# EAGLE board power (EAGLE 9.6.2)
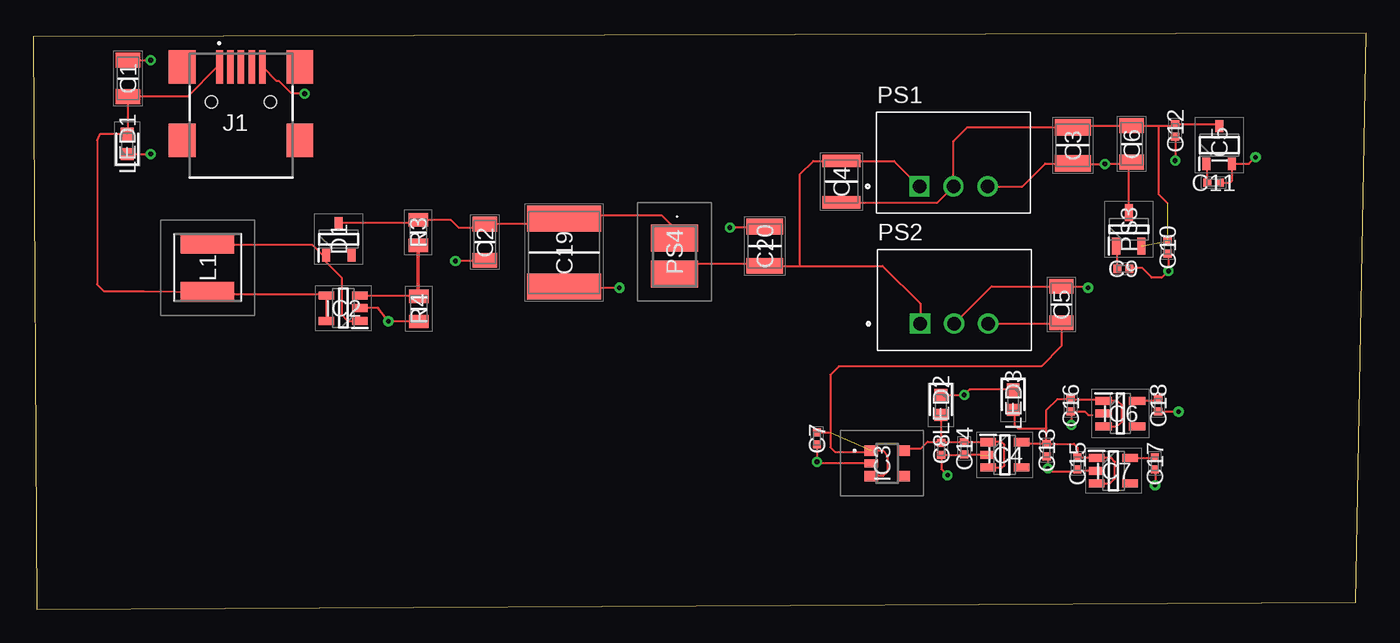
[diagram p0: board, top side]
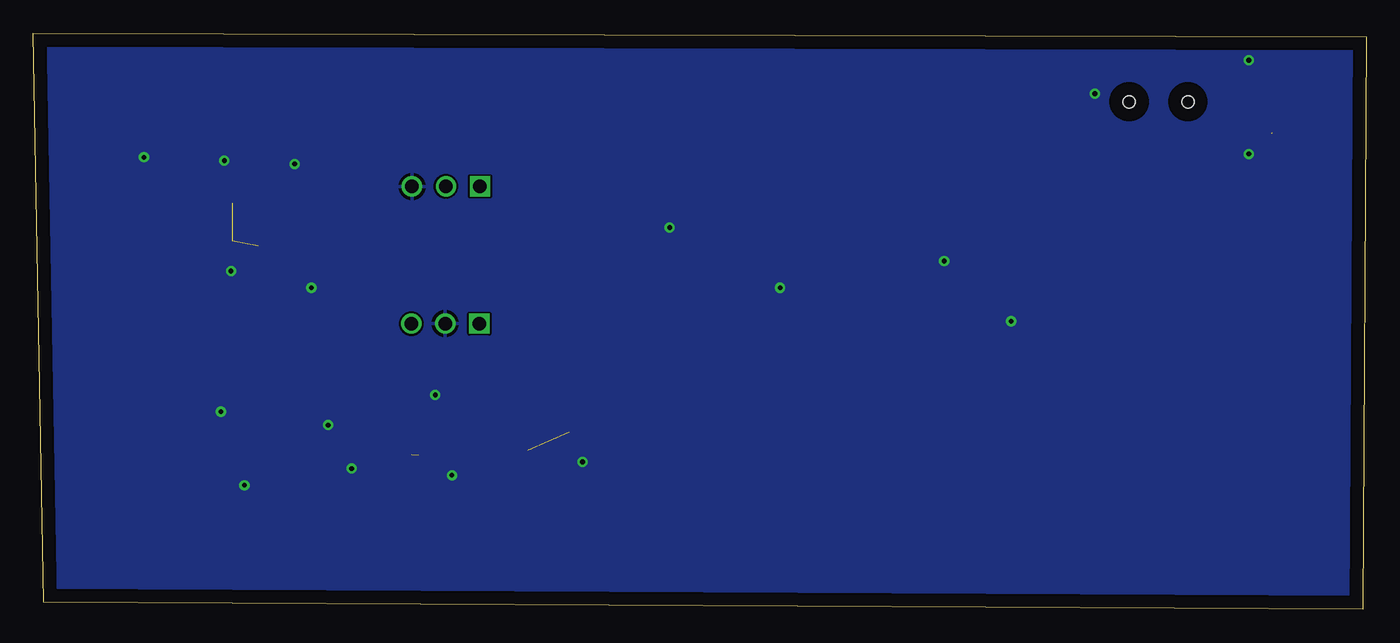
[diagram p1: board, bottom side, seen from below]

Size 99.5 x 43 mm. Coordinates in mm from the lower left corner, seen from the top.
Outline: 0.25,0 98.75,0.5 99.5,43 0,42.75 0.25,0
Copper layers (1*16): Top 0.035mm / dielectric 1.5mm / Bottom 0.035mm
Design rules "default": minimum track width 6mil, minimum drill 0.35mm, track to track 6mil, track to pad 6mil, pad to pad 6mil, via to via 6mil, smd to smd 6mil, copper to edge 40mil, drill to drill 6mil, minimum pad ring 10mil, minimum via ring 8mil, stop-mask expansion 4mil, vias tented up to drill 0mil, thermal gap 10mil

## Footprints (pad centres in the part's own frame; a part is rotated, then mirrored left to right if it is on the bottom)
CAPC3216X180N = smd 1.1 x 1.82: 1 -1.36,0; 2 1.36,0
CAPC3225X270N = smd 1.22 x 2.72: 1 -1.35,0; 2 1.35,0
CAPC3225X280N = smd 0.91 x 2.82: 1 -1.55,0; 2 1.55,0
CAPC1005X55N = smd 0.6 x 0.62: 1 -0.46,0; 2 0.46,0
CAPC6153X390N = smd 1.95 x 5.52: 1 -2.53,0; 2 2.53,0
CAPC3325X279N = smd 1.18 x 2.72: 1 -1.47,0; 2 1.47,0
SOT95P240X115-3N = smd 0.9 x 0.6: 1 -1.2,0.95; 2 -1.2,-0.95; 3 1.2,0
SOT95P280X145-5N = smd 1.15 x 0.6: 1 -1.25,0.95; 2 -1.25,0; 3 -1.25,-0.95; 4 1.25,-0.95; 5 1.25,0.95
TCR2EF50LMCT = smd 0.8 x 1: 1 -0.95,-1.2; 3 0.95,-1.2; 4 0.95,1.2; 5 -0.95,1.2 | smd 0.6 x 1: 2 0,-1.2
SOT95P280X100-5N = smd 1.15 x 0.6: 1 -1.25,0.95; 2 -1.25,0; 3 -1.25,-0.95; 4 1.25,-0.95; 5 1.25,0.95
SOT95P280X130-3N = smd 0.9 x 0.6: 1 -1.4,0.95; 2 -1.4,-0.95; 3 1.4,0
SOT95P275X110-5N = smd 1.25 x 0.6: 1 -1.25,0.95; 2 -1.25,0; 3 -1.25,-0.95; 4 1.25,-0.95; 5 1.25,0.95
65100516121 = smd 0.5 x 2.5: 1 -1.6,-1; 2 -0.8,-1; 3 0,-1; 4 0.8,-1; 5 1.6,-1 | smd 2 x 2.5: 6 -4.4,-1; 7 4.4,-1; 8 4.4,-6.5; 9 -4.4,-6.5 | hole 0.9: -2.2,-3.6; 2.2,-3.6
VLS5045EX330M = smd 1.5 x 4: 1 -1.8,0; 2 1.8,0
LEDC1608X40N = smd 0.9 x 0.95: 1 -0.75,0; 2 0.75,0
CONV_R-786.5-0.5 = drill 1 square: 1 -2.54,-1.775 | drill 1: 2 0,-1.775; 3 2.54,-1.775
SOT95P275X130-3N = smd 1.25 x 0.6: 1 -1.25,0.95; 2 -1.25,-0.95; 3 1.25,0
RLS397 = smd 2 x 3.5: 1 -1.35,0; 2 1.35,0
RESC2012X55N = smd 1 x 1.45: 1 -0.95,0; 2 0.95,0

## Placement (x,y rotation side)
C1  LMF316AB7475KLHT  [CAPC3216X180N]  7.05,39.64 90 top
C2  LMF316AB7475KLHT  [CAPC3216X180N]  33.7,27.41 270 top
C3  LMF325B7106KMHP  [CAPC3225X270N]  77.61,34.64 90 top
C4  GRJ32ER71H106KE11L  [CAPC3225X280N]  60.33,31.93 270 top
C5  LMF316AB7475KLHT  [CAPC3216X180N]  76.75,22.75 90 top
C6  LMF316AB7475KLHT  [CAPC3216X180N]  82,34.75 270 top
C7  GRM155R70J105KA12D  [CAPC1005X55N]  58.5,12.75 270 top
C8  GRM155R70J105KA12D  [CAPC1005X55N]  67.78,11.97 270 top
C9  GRM155R70J105KA12D  [CAPC1005X55N]  81.38,25.43 180 top
C10  GRM155R70J105KA12D  [CAPC1005X55N]  84.68,27.03 90 top
C11  GRM155R70J105KA12D  [CAPC1005X55N]  88.12,31.86 0 top
C12  GRM155R70J105KA12D  [CAPC1005X55N]  85.25,35.75 270 top
C13  GRM155R70J105KA12D  [CAPC1005X55N]  75.65,11.88 270 top
C14  GRM155R70J105KA12D  [CAPC1005X55N]  69.5,12 270 top
C15  GRM155R70J105KA12D  [CAPC1005X55N]  77.94,10.88 270 top
C16  GRM155R70J105KA12D  [CAPC1005X55N]  77.44,15.22 270 top
C17  GRM155R70J105KA12D  [CAPC1005X55N]  83.73,10.88 270 top
C18  GRM155R70J105KA12D  [CAPC1005X55N]  83.98,15.22 270 top
C19  KRM55QR72A106KH01L  [CAPC6153X390N]  39.63,26.63 270 top
C20  12101C335KAT2A  [CAPC3325X279N]  54.61,27.11 90 top
D1  BAT54CHYFHT116  [SOT95P240X115-3N]  22.79,27.63 90 top
IC2  LM2703MFX-ADJ_NOPB  [SOT95P280X145-5N]  23.13,22.48 180 top
IC3  TCR2EF50,LM_CT  [TCR2EF50LMCT]  63.76,10.89 270 top
IC4  ADM7160AUJZ-2.5-R7  [SOT95P280X100-5N]  72.53,11.52 0 top
IC5  XC6902N251MR-G  [SOT95P280X130-3N]  88.54,34.66 90 top
IC6  NCV8114ASN165T1G  [SOT95P275X110-5N]  81.16,14.61 0 top
IC7  NCP163ASN150T1G  [SOT95P280X145-5N]  80.64,10.33 0 top
J1  65100516121  [65100516121]  15.5,41.5 0 top
L1  VLS5045EX-100M-H  [VLS5045EX330M]  13,25.5 90 top
LED1  LT_Q39G-Q1OO-25-1  [LEDC1608X40N]  7,34.75 90 top
LED2  LT_Q39G-Q1OO-25-1  [LEDC1608X40N]  67.75,15.25 270 top
LED3  LB_Q39E-N1OO-35-1  [LEDC1608X40N]  73.15,15.64 270 top
PS1  R-786.5-0.5  [CONV_R-786.5-0.5]  68.7,33.35 0 top
PS2  R-786.5-0.5  [CONV_R-786.5-0.5]  68.75,23.1 0 top
PS3  TC595002ECBTR  [SOT95P275X130-3N]  81.79,28.37 90 top
PS4  RLS-397  [RLS397]  47.86,26.37 270 top
R3  TNPW080527K4BEEN  [RESC2012X55N]  28.73,28.14 90 top
R4  TNPW080527K4BEEN  [RESC2012X55N]  28.77,22.43 270 top

## Library data of the parts
C1 C2 C5 C6 = SamacSys_Parts; DESCRIPTION: Multilayer Ceramic Capacitors MLCC - SMD/SMT 1206 10VDC 4.7uF 10% X7R AEC-Q200; HEIGHT: 1.8mm; MANUFACTURER_NAME: TAIYO YUDEN; MANUFACTURER_PART_NUMBER: LMF316AB7475KLHT; MOUSER_PART_NUMBER: 963-LMF316AB7475KLHT; MOUSER_PRICE-STOCK: https://www.mouser.co.uk/ProductDetail/Taiyo-Yuden/LMF316AB7475KLHT?qs=%252B6g0mu59x7Jucp0YIcNtlw%3D%3D
C3 = SamacSys_Parts; DESCRIPTION: Multilayer Ceramic Capacitors MLCC - SMD/SMT 1210 10VDC 10uF 10% X7R AEC-Q200; HEIGHT: 2.7mm; MANUFACTURER_NAME: TAIYO YUDEN; MANUFACTURER_PART_NUMBER: LMF325B7106KMHP; MOUSER_PART_NUMBER: 963-LMF325B7106KMHP; MOUSER_PRICE-STOCK: https://www.mouser.co.uk/ProductDetail/Taiyo-Yuden/LMF325B7106KMHP?qs=W%2FMpXkg%252BdQ7tCScIXneZ%2FA%3D%3D
C4 = SamacSys_Parts; ARROW_PART_NUMBER: GRJ32ER71H106KE11L; ARROW_PRICE-STOCK: https://www.arrow.com/en/products/grj32er71h106ke11l/murata-manufacturing?region=nac; DESCRIPTION: Cap Ceramic 10uF 50V X7R 10% Pad SMD 1210 Soft Termination 125C T/R; HEIGHT: 2.8mm; MANUFACTURER_NAME: Murata Electronics; MANUFACTURER_PART_NUMBER: GRJ32ER71H106KE11L; MOUSER_PART_NUMBER: 81-GRJ32ER71H106KE1L; MOUSER_PRICE-STOCK: https://www.mouser.co.uk/ProductDetail/Murata-Electronics/GRJ32ER71H106KE11L?qs=Mkt%2FZhxPIiRCGrZ4HFiKZA%3D%3D
C7-C18 = SamacSys_Parts; ARROW_PART_NUMBER: GRM155R70J105KA12D; ARROW_PRICE-STOCK: https://www.arrow.com/en/products/grm155r70j105ka12d/murata-manufacturing?region=nac; DESCRIPTION: Multilayer Ceramic Capacitors MLCC - SMD/SMT 0402 1.0uF 6.3volts *Derate Voltage/Temp; HEIGHT: 0.55mm; MANUFACTURER_NAME: Murata Electronics; MANUFACTURER_PART_NUMBER: GRM155R70J105KA12D; MOUSER_PART_NUMBER: 81-GRM155R70J105KA2D; MOUSER_PRICE-STOCK: https://www.mouser.co.uk/ProductDetail/Murata-Electronics/GRM155R70J105KA12D?qs=OXzh9Ga2KBHWfvlODrgZnQ%3D%3D
C19 = SamacSys_Parts; ARROW_PART_NUMBER: KRM55QR72A106KH01L; ARROW_PRICE-STOCK: https://www.arrow.com/en/products/krm55qr72a106kh01l/murata-manufacturing?region=nac; DESCRIPTION: Multilayer Ceramic Capacitors MLCC - SMD/SMT; HEIGHT: 3.9mm; MANUFACTURER_NAME: Murata Electronics; MANUFACTURER_PART_NUMBER: KRM55QR72A106KH01L; MOUSER_PART_NUMBER: 81-KRM55QR72A106KH1L; MOUSER_PRICE-STOCK: https://www.mouser.co.uk/ProductDetail/Murata-Electronics/KRM55QR72A106KH01L?qs=qkDYIeTQ%252BElto0fJu%2F86Vw%3D%3D
C20 = SamacSys_Parts; DESCRIPTION: Multilayer Ceramic Capacitors MLCC - SMD/SMT 100V 3.3uF X7R 1210 10%; HEIGHT: 2.79mm; MANUFACTURER_NAME: AVX; MANUFACTURER_PART_NUMBER: 12101C335KAT2A; MOUSER_PART_NUMBER: 581-12101C335KAT2A; MOUSER_PRICE-STOCK: https://www.mouser.co.uk/ProductDetail/AVX/12101C335KAT2A?qs=t3bE0qb%2FqELbFuOKr%2F10pA%3D%3D
D1 = SamacSys_Parts; DESCRIPTION: Schottky Diodes & Rectifiers SCHOTTKY BARRIER DIODE; HEIGHT: 1.15mm; MANUFACTURER_NAME: ROHM Semiconductor; MANUFACTURER_PART_NUMBER: BAT54CHYFHT116; MOUSER_PART_NUMBER: 755-BAT54CHYFHT116; MOUSER_PRICE-STOCK: https://www.mouser.co.uk/ProductDetail/ROHM-Semiconductor/BAT54CHYFHT116?qs=QNEnbhJQKvbxVoFekP9UeQ%3D%3D
IC2 = SamacSys_Parts; ARROW_PART_NUMBER: LM2703MFX-ADJ/NOPB; ARROW_PRICE-STOCK: https://www.arrow.com/en/products/lm2703mfx-adjnopb/texas-instruments; DESCRIPTION: Micropower Step-Up DC/DC Converter with 350mA Peak Current Limit; HEIGHT: 1.45mm; MANUFACTURER_NAME: Texas Instruments; MANUFACTURER_PART_NUMBER: LM2703MFX-ADJ/NOPB; MOUSER_PART_NUMBER: 926-LM2703MFXADJNOPB; MOUSER_PRICE-STOCK: https://www.mouser.com/Search/Refine.aspx?Keyword=926-LM2703MFXADJNOPB
IC3 = SamacSys_Parts; DESCRIPTION: LDO Voltage Regulators 200mA LDO, Vout=5.0V, Dropout=180mV, Iq=35uA, PSRR=73dB, in SOT-25 (SMV) package; HEIGHT: 1.4mm; MANUFACTURER_NAME: Toshiba; MANUFACTURER_PART_NUMBER: TCR2EF50,LM(CT; MOUSER_PART_NUMBER: 757-TCR2EF50LMCT; MOUSER_PRICE-STOCK: https://www.mouser.co.uk/ProductDetail/Toshiba/TCR2EF50LMCT?qs=bZr6mbWTK5m4vMduq2OXCA%3D%3D
IC4 = SamacSys_Parts; DESCRIPTION: LDO Voltage Regulators 200mA LDO 25Vout; HEIGHT: 1mm; MANUFACTURER_NAME: Linear Technology; MANUFACTURER_PART_NUMBER: ADM7160AUJZ-2.5-R7; MOUSER_PART_NUMBER: 584-ADM7160AUJZ2.5R7; MOUSER_PRICE-STOCK: https://www.mouser.com/Search/Refine.aspx?Keyword=584-ADM7160AUJZ2.5R7
IC5 = SamacSys_Parts; DESCRIPTION: LDO Voltage Regulators; HEIGHT: 1.3mm; MANUFACTURER_NAME: Torex; MANUFACTURER_PART_NUMBER: XC6902N251MR-G; MOUSER_PART_NUMBER: 865-XC6902N251MR-G; MOUSER_PRICE-STOCK: https://www.mouser.co.uk/ProductDetail/Torex-Semiconductor/XC6902N251MR-G/?qs=AsjdqWjXhJ97TLkuQPXWBQ%3D%3D
IC6 = SamacSys_Parts; ARROW_PART_NUMBER: NCV8114ASN165T1G; ARROW_PRICE-STOCK: https://www.arrow.com/en/products/ncv8114asn165t1g/on-semiconductor?region=nac; DESCRIPTION: ONSEMI - NCV8114ASN165T1G - LDO REGULATOR, 300 MA, LOW IQ 1.65V AD; HEIGHT: 1.1mm; MANUFACTURER_NAME: ON Semiconductor; MANUFACTURER_PART_NUMBER: NCV8114ASN165T1G; MOUSER_PART_NUMBER: 863-NCV8114ASN165T1G; MOUSER_PRICE-STOCK: https://www.mouser.co.uk/ProductDetail/onsemi/NCV8114ASN165T1G?qs=PqoDHHvF64%252BWMsY7A2HF3Q%3D%3D
IC7 = SamacSys_Parts; DESCRIPTION: ONSEMI - NCP163ASN150T1G - LDO Voltage Regulator, Fixed, 2.2 V to 5.5 V in, 1.5 V / 250 mA out, SOT23-5; HEIGHT: 1.45mm; MANUFACTURER_NAME: ON Semiconductor; MANUFACTURER_PART_NUMBER: NCP163ASN150T1G; MOUSER_PART_NUMBER: 863-NCP163ASN150T1G; MOUSER_PRICE-STOCK: https://www.mouser.co.uk/ProductDetail/onsemi/NCP163ASN150T1G?qs=vLWxofP3U2x6R82l9MbdEQ%3D%3D
J1 = SamacSys_Parts; DESCRIPTION: WR-COM USB Connector Mini horizontal SMD Wurth Elektronik WR-COM Series Right Angle SMT Type B Mini USB Connector Receptacle, 30 V ac, 1A; HEIGHT: mm; MANUFACTURER_NAME: Wurth Elektronik; MANUFACTURER_PART_NUMBER: 65100516121; MOUSER_PART_NUMBER: 710-65100516121; MOUSER_PRICE-STOCK: https://www.mouser.co.uk/ProductDetail/Wurth-Elektronik/65100516121?qs=rS3zZhy2AQPLyCguT204Og%3D%3D
L1 = SamacSys_Parts; ARROW_PART_NUMBER: VLS5045EX-100M-H; ARROW_PRICE-STOCK: https://www.arrow.com/en/products/vls5045ex-100m-h/tdk; DESCRIPTION: SMD / SMT Inductors (Coils), L=10?H, L x W x T :; HEIGHT: 4mm; MANUFACTURER_NAME: TDK; MANUFACTURER_PART_NUMBER: VLS5045EX-100M-H; MOUSER_PART_NUMBER: 810-VLS5045EX-100M-H; MOUSER_PRICE-STOCK: https://www.mouser.co.uk/ProductDetail/TDK/VLS5045EX-100M-H?qs=EBDBlbfErPxDDKYBGzjLDg%3D%3D
LED1 LED2 = SamacSys_Parts; DESCRIPTION: 2.85 V Green LED 1608 (0603) SMD,Osram Opto CHIPLED 0603 LT Q39G-Q1OO-25-1; HEIGHT: 0.4mm; MANUFACTURER_NAME: OSRAM; MANUFACTURER_PART_NUMBER: LT Q39G-Q1OO-25-1; MOUSER_PART_NUMBER: 720-LTQ39GQ1S22515; MOUSER_PRICE-STOCK: https://www.mouser.co.uk/ProductDetail/OSRAM-Opto-Semiconductors/LT-Q39G-Q1OO-25-1?qs=74fRo9GAWszgXtz8D2kVhg%3D%3D
LED3 = SamacSys_Parts; DESCRIPTION: Standard LEDs - SMD Blue 470nm; HEIGHT: 0.4mm; MANUFACTURER_NAME: OSRAM; MANUFACTURER_PART_NUMBER: LB Q39E-N1OO-35-1; MOUSER_PART_NUMBER: 720-LBQ39EN1P1351; MOUSER_PRICE-STOCK: https://www.mouser.co.uk/ProductDetail/OSRAM-Opto-Semiconductors/LB-Q39E-N1OO-35-1?qs=74fRo9GAWsyCe%2Fcwa%2FhbPA%3D%3D
PS1 PS2 = R-786.5-0.5; DESCRIPTION: 0.5A DC/DC-Converter 'INNOLINE' SIP3 reg; DIGI-KEY_PART_NUMBER: 945-1039-ND; MF: Recom Power; MP: R-786.5-0.5; PACKAGE: SIP-3 Recom Power; PURCHASE-URL: https://pricing.snapeda.com/search/part/R-786.5-0.5/?ref=eda
PS3 = SamacSys_Parts; ARROW_PART_NUMBER: TC595002ECBTR; ARROW_PRICE-STOCK: https://www.arrow.com/en/products/tc595002ecbtr/microchip-technology; DESCRIPTION: 100mA -5V LDO Negative Regulator SOT-23A Microchip TC595002ECBTR, LDO Voltage Regulator, 100mA,; HEIGHT: 1.3mm; MANUFACTURER_NAME: Microchip; MANUFACTURER_PART_NUMBER: TC595002ECBTR; MOUSER_PART_NUMBER: 579-TC595002ECBTR; MOUSER_PRICE-STOCK: https://www.mouser.co.uk/ProductDetail/Microchip-Technology/TC595002ECBTR?qs=n%2FfJlMG9rCbPVifAtUx8yQ%3D%3D
PS4 = SamacSys_Parts; DESCRIPTION: Inductor Power Unshielded Wirewound 3.9uH 20% 100KHz 1.32A 0.14Ohm DCR 1812 Bag; HEIGHT: 3.1mm; MANUFACTURER_NAME: RECOM Power; MANUFACTURER_PART_NUMBER: RLS-397; MOUSER_PART_NUMBER: 919-RLS-397; MOUSER_PRICE-STOCK: https://www.mouser.co.uk/ProductDetail/RECOM-Power/RLS-397?qs=gZXFycFWdAMzj7SWZ0VCrw%3D%3D
R3 R4 = SamacSys_Parts; DESCRIPTION: Thin Film Resistors - SMD 27.4Kohms .1% 25ppm; HEIGHT: 0.55mm; MANUFACTURER_NAME: Vishay; MANUFACTURER_PART_NUMBER: TNPW080527K4BEEN; MOUSER_PART_NUMBER: 71-TNPW080527K4BEEN; MOUSER_PRICE-STOCK: https://www.mouser.co.uk/ProductDetail/Vishay-Dale/TNPW080527K4BEEN?qs=hgbOVb73YtioxFqgMNH98g%3D%3D

## Nets
1.5V: C17.1 IC7.5
1.65V: C18.1 IC6.5
2.5V: C13.1 C15.1 C16.1 IC4.5 IC6.1 IC6.3 IC7.1 IC7.3 LED3.2
5V: C8.1 C14.1 IC3.5 IC4.1 IC4.3 LED2.2
6.5V: C5.1 C7.1 IC3.1 IC3.3 PS2.3
-2.5V: C11.1 IC5.1
-5V: C9.2 PS3.1
-6.5V: C3.2 C4.2 C6.1 C10.2 C12.1 IC5.3 PS1.2 PS3.2
GND: C1.2 C2.2 C3.1 C5.2 C6.2 C7.2 C8.2 C9.1 C10.1 C11.2 C12.2 C13.2 C14.2 C15.2 C16.2 C17.2 C18.2 C19.2 C20.2 IC2.2 IC3.2 IC4.2 IC5.2 IC7.2 J1.5 LED1.1 LED2.1 LED3.1 PS1.3 PS2.2 PS3.3 R4.2
IN: C2.1 C19.1 D1.3 PS4.1 R3.2
N$2: IC2.3 R3.1 R4.1
N$7: C4.1 C20.1 PS1.1 PS2.1 PS4.2
N$8: D1.1 IC2.1 L1.2
VIN: C1.1 IC2.4 IC2.5 J1.1 L1.1 LED1.2

## Tracks (layer width: path | path; a pad name or v marks a point on that pad's centre or on a via)
1.5V
  Top 0.152: IC7.5 83.67,11.28 C17.1
1.65V
  Top 0.152: C18.1 83.86,15.56 IC6.5
2.5V
  Top 0.152: C13.1 73.91,12.34 IC4.5 | C16.1 77.51,15.75 | 79.72,15.75 IC6.1 | C16.1 76.44,15.68 75.65,14.89 75.65,13.5 | C13.1 75.65,13.5 | IC6.1 79.79,15.68 C16.1 | C13.1 77.69,12.34 77.94,12.09 C15.1 79.33,11.34 IC7.1 80.47,11.28 80.75,11 80.75,9.75 80.38,9.38 IC7.3 | IC6.3 80.91,13.66 81.25,14 81.25,15.25 80.94,15.56 IC6.1 | LED3.2 73.25,14.79 73.25,13.75 73.5,13.5 75.65,13.5
5V
  Top 0.152: IC4.3 72.32,10.57 72.5,10.75 72.5,12.25 72.25,12.5 71.31,12.5 IC4.1 C14.1 67.81,12.46 C8.1 67.78,12.5 | 67.78,12.5 67.78,14.47 LED2.2 | IC3.5 65.12,12 66.25,12 66.75,12.5 67.78,12.5
6.5V  (1 unrouted)
  Top 0.152: PS2.3 76.69,21.33 C5.1 76.75,19.64 75.25,18.14 60.14,18.14 59.5,17.5 59.5,12.09 59.84,11.75 62.47,11.75 IC3.1 63.41,11.84 63.75,11.5 63.75,10.25 63.44,9.94 IC3.3 | C7.1 59.5,13.21
-2.5V
  Top 0.152: C11.1 87.66,33.19 IC5.1
-5V
  Top 0.152: C9.2 80.92,27.04 PS3.1
-6.5V  (2 unrouted)
  Top 0.152: C4.2 67.5,30.38 PS1.2 68.7,34.95 69.74,35.99 C3.2 77.73,36.11 C6.1 84,36.11 | 84,36.11 85.15,36.11 C12.1 88.39,36.21 IC5.3 | 84,36.11 84,31 84.68,30.32
GND  (via drill 0.35, 0.35 pad 0.6)  (1 unrouted)
  Top 0.152: PS1.3 73.83,31.58 75.54,33.29 C3.1 77.65,33.25 v80,33.25 81.75,33.25 | PS2.2 71.53,24.11 C5.2 78.64,24.11 v78.75,24 | LED1.1 v8.75,34 | C1.2 v8.75,41 | 33.67,26.02 C2.2 33.65,26 v31.5,26 | R4.2 v26.5,21.5 25.75,22.5 IC2.2 | v43.75,24 39.73,24 C19.2 | C7.2 v58.5,11 58.61,10.89 IC3.2 | LED2.1 v69.5,16 69.89,16.39 LED3.1 | v68.25,10 67.78,10.47 C8.2 69.47,11.51 C14.2 70.71,11.54 70.75,11.5 | C13.2 75.75,11.32 v75.75,10.5 76,10.25 77.77,10.25 C15.2 78.03,10.33 IC7.2 | v77.5,13.75 77.5,14.7 C16.2 78.49,14.76 78.75,14.5 79.06,14.5 | C17.2 83.75,10.4 v83.75,9.25 | C18.2 v85.49,14.76 v85.5,14.75 | C11.2 89.36,31.86 89.5,32 IC5.2 90.76,33.26 v91.25,33.75 | C12.2 v85.25,33.5 | C6.2 81.86,33.25 81.75,33.25 | C10.1 84.75,26.5 v84.75,25.25 84.25,24.75 83.5,24.75 82.75,25.5 81.91,25.5 C9.1 | PS3.3 81.79,33.21 81.75,33.25 | C20.2 54.53,28.5 v52,28.5 | v20.25,38.5 19.28,38.5 18.34,39.44 18.16,39.44 J1.5
  pour Bottom: -0.25,42.75 99.5,42.75 99.5,1 -0.25,1 -0.5,43 arc60
IN
  Top 0.152: D1.3 28.47,28.83 R3.2 31.16,29.09 31.75,28.5 33.43,28.5 C2.1 39.24,28.77 C19.1 39.88,29.41 46.92,29.41 47.86,28.47 PS4.1
N$2
  Top 0.152: R4.1 28.73,23.42 28.72,23.43 IC2.3
  Top 0.254: R3.1 28.73,23.42
N$7
  Top 0.152: PS4.2 48.61,25.77 54.48,25.77 C20.1 | C20.1 63.4,25.64 66.21,22.83 PS2.1 | C20.1 57.25,25.64 57.25,32.5 58.23,33.48 C4.1 64.25,33.48 PS1.1
N$8
  Top 0.152: L1.2 13.13,27.18 20.84,27.18 21.59,26.43 D1.1 21.84,25.93 23,24.77 23,22 23.47,21.53 IC2.1
VIN  (1 unrouted)
  Top 0.152: J1.1 13.72,40.5 11.5,38.28 C1.1 7.05,35.55 | IC2.5 IC2.4 21.81,23.5 13.2,23.5 L1.1 8.25,23.75 5.25,23.75 4.75,24.25 4.75,35 5,35.5 LED1.2